# Altium PCB RA64500_jc20_rotary2.PcbDoc
Units mm, origin at the board's own origin, x right, y up, seen from the top; angles counter-clockwise.
Board outline 45.5 x 78 mm, 2 copper layers (Top Layer, Bottom Layer), stack 0.58 mm thick; 53 components, 74 nets, 212 pads, 162 vias.
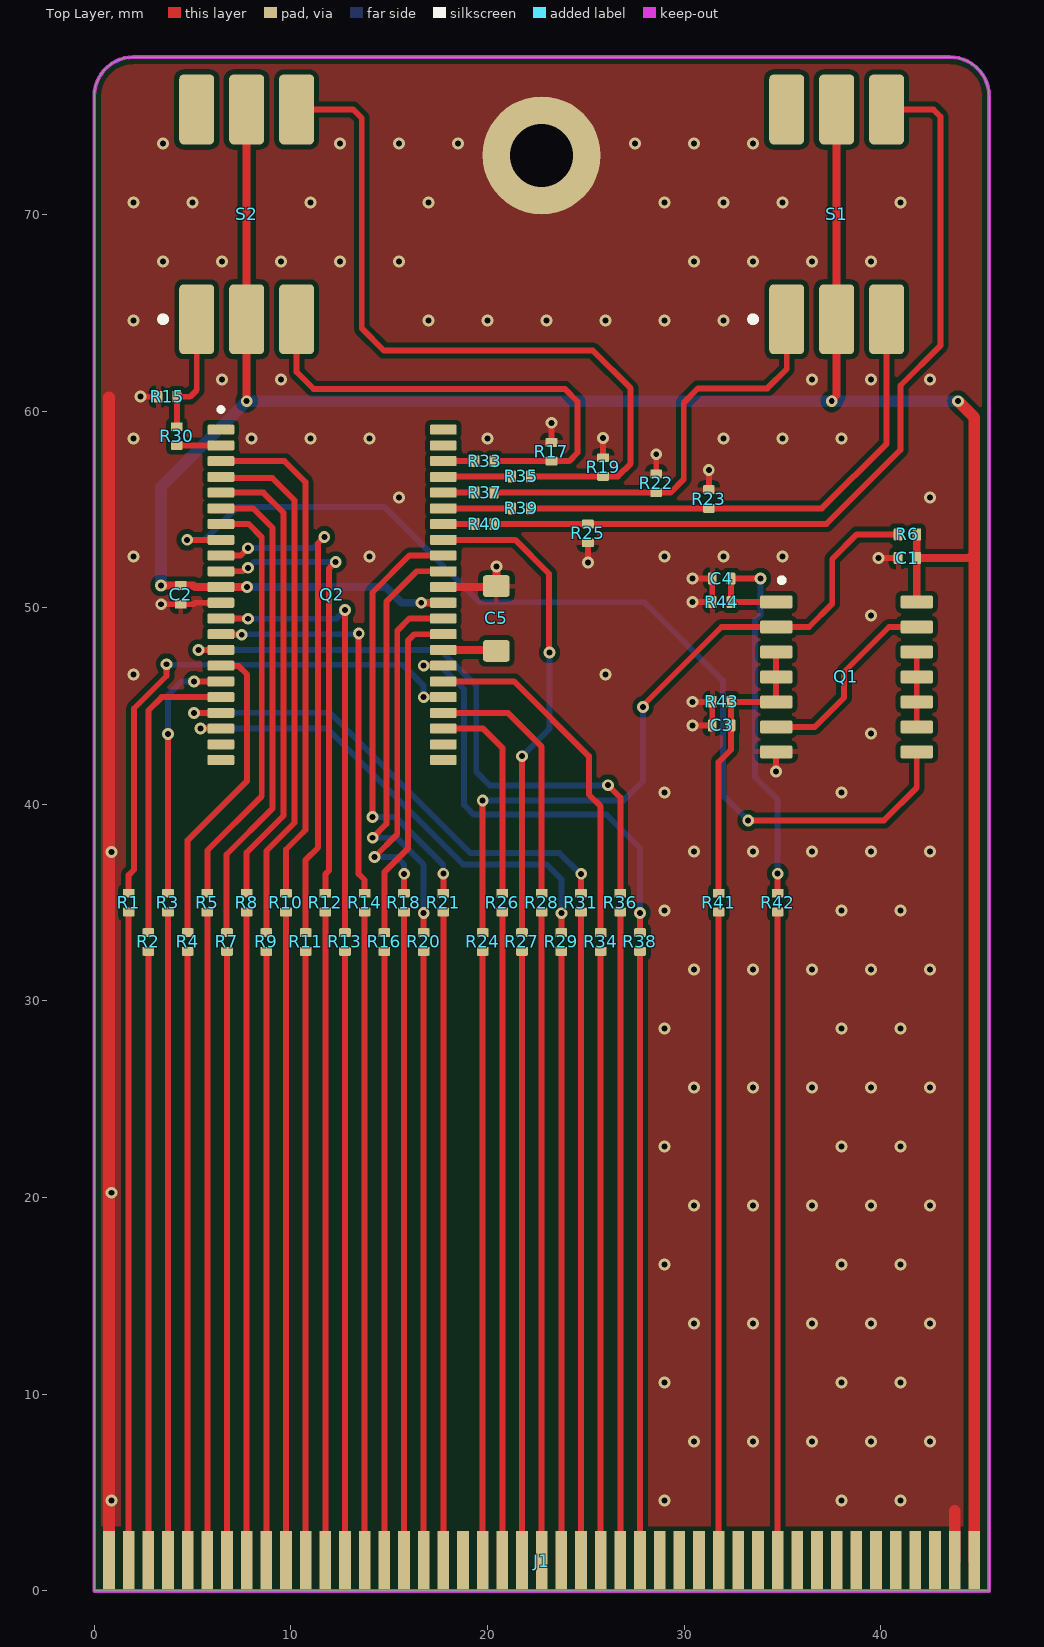
[diagram p0: Top Layer view]
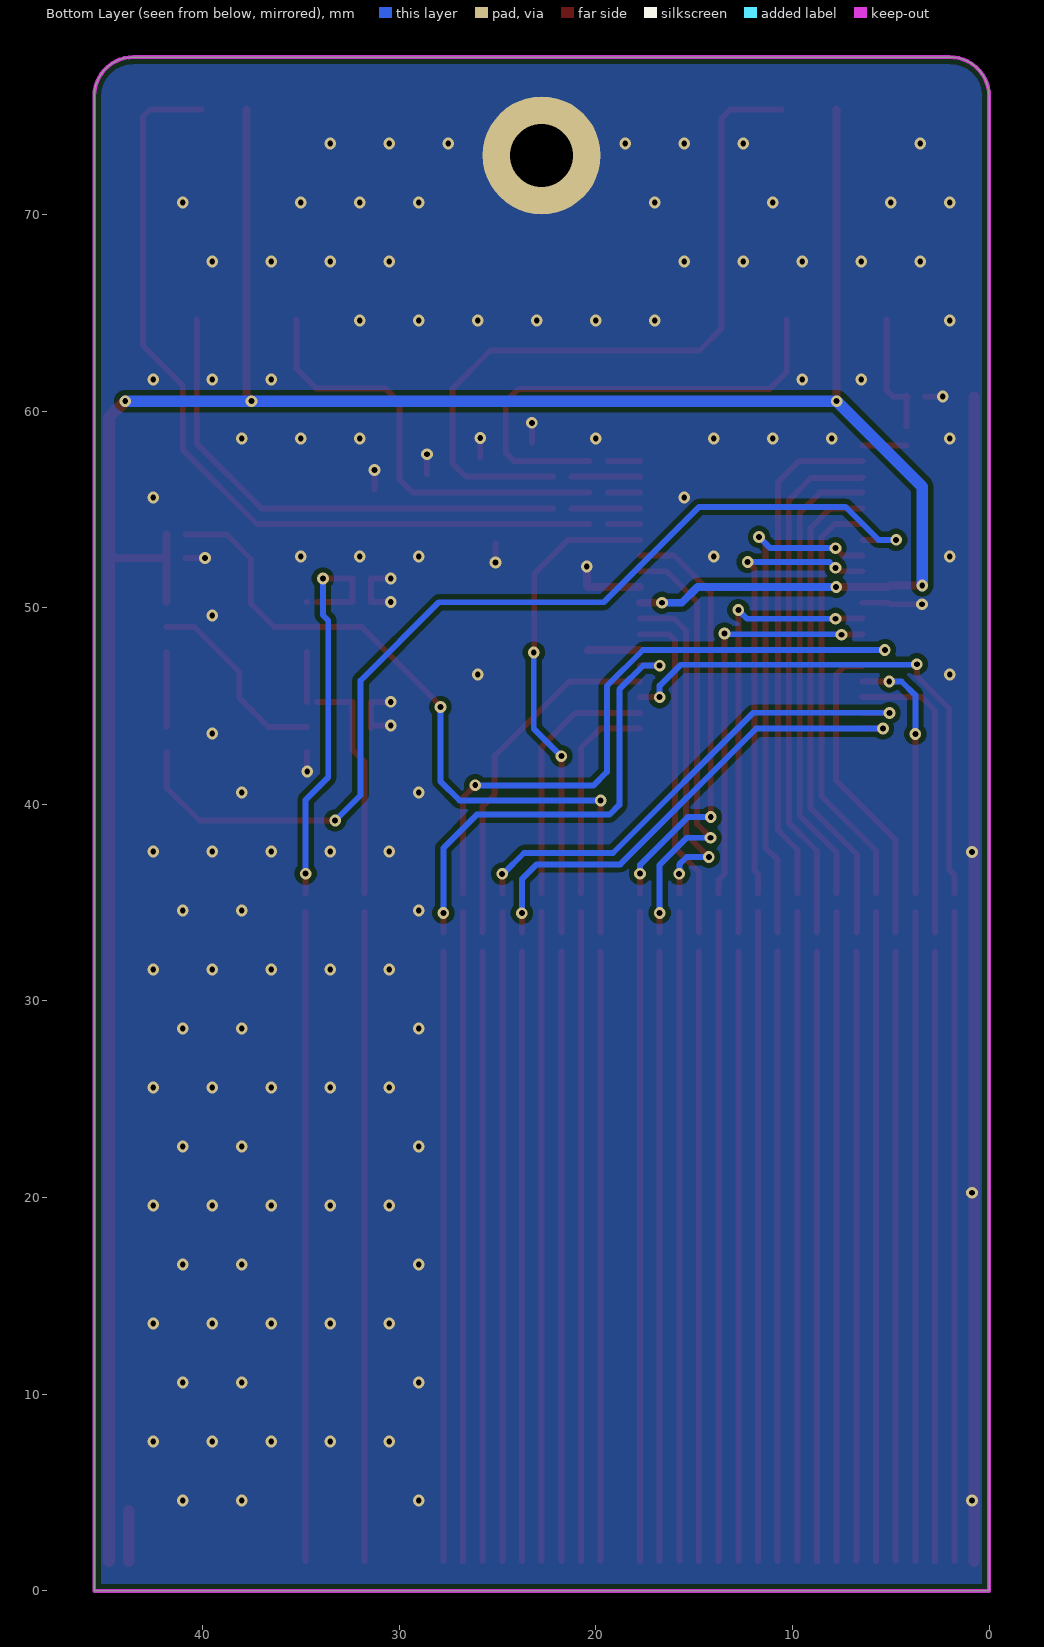
[diagram p1: Bottom Layer view, seen from below]
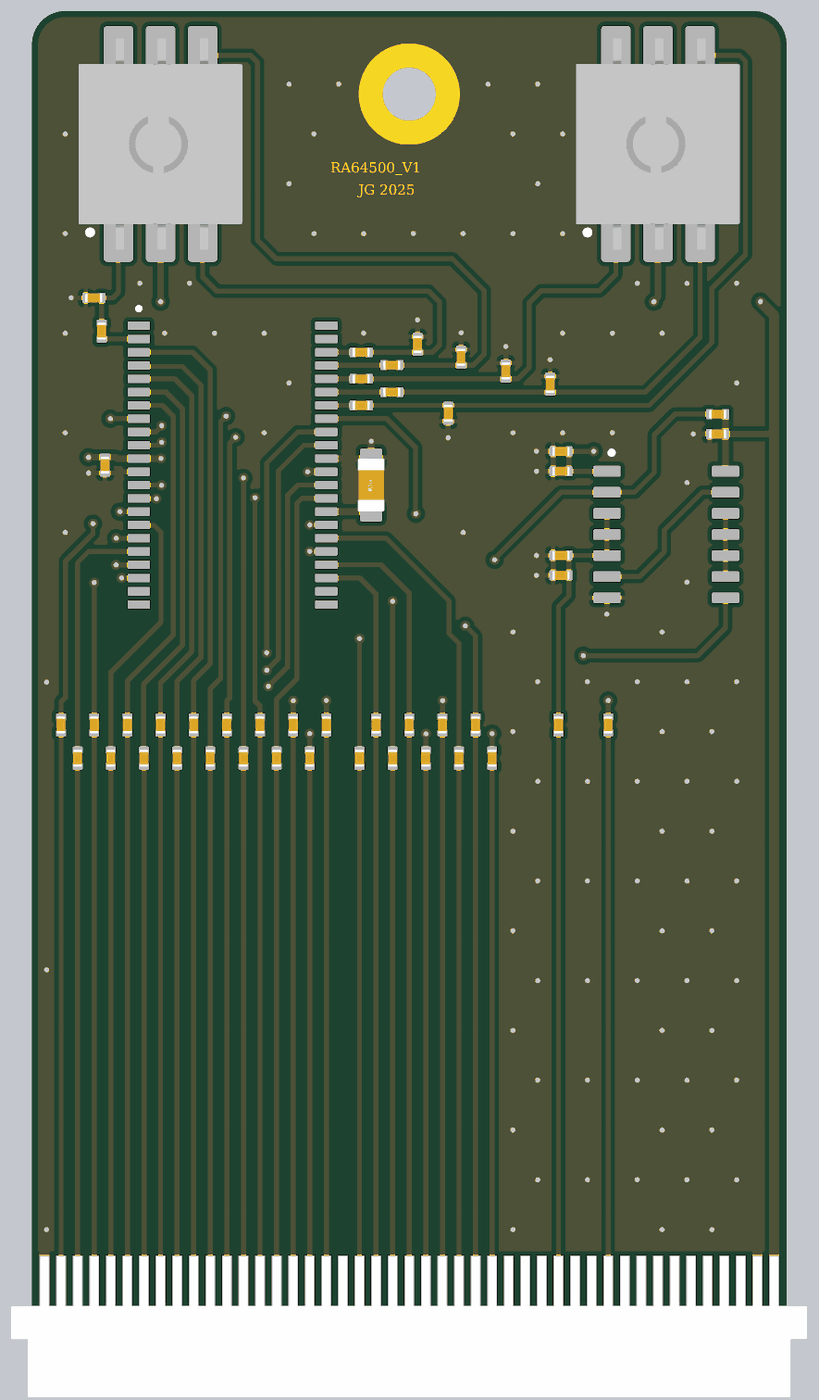
[diagram p2: 3D render of the assembled board from above, using the file's embedded part models]

## Layer stack, top to bottom
Top Solder: solder mask 0.0102, Solder Resist, Dk 3.5
Top Layer: signal copper 0.0356
Dielectric 1: dielectric 0.5086, FR-4, Dk 4.8
Bottom Layer: signal copper 0.0356
Bottom Solder: solder mask 0.0102, Solder Resist, Dk 3.5

## Board outline
0,0 0,76 cw(c2,76) 2,78 43.5,78 cw(c43.5,76) 45.5,76 45.5,0

## Design rules (kind name [scope] priority, off if disabled: settings)
Clearance [All] p1: gap=0.254 ignorepadtopadclearanceinfootprint=FALSE
PolygonConnect [All] p1: thpad.connectstyle=Direct thpad.reliefconductorwidth=0.254 thpad.reliefentries=4 thpad.polygonreliefangle="90 Angle" thpad.airgapwidth=0.254 smdpad.connectstyle=Relief smdpad.reliefconductorwidth=0.254 smdpad.reliefentries=4 smdpad.polygonreliefangle="90 Angle" smdpad.airgapwidth=0.254 via.connectstyle=Direct via.reliefconductorwidth=0.254 via.reliefentries=4 via.polygonreliefangle="90 Angle" via.airgapwidth=0.254
RoutingVias [All] p1: holewidth=0.711 width=1.27 viastyle="Through Hole" minholewidth=0.711 minwidth=1.27 maxholewidth=0.711 maxwidth=1.27
SolderMaskExpansion [All] p1: expansion=0.102 istentingtop=FALSE
Width [All] p1: maxlimit=0.6 minlimit=0.254 preferedwidth=0.3
30 further rules are at their usual default settings.

## Components (designator, comment, footprint, x,y, rotation, side; value= is the part's Value field where it differs from the comment)
C1 "220pF" 0402 41.35,52.525 r0 top
C2 "100nF" 0402 4.4,50.65 r90 top
C3 "220pF" 0402 31.9,44.012 r0 top
C4 "220pF" 0402 31.9,51.482 r0 top
C5 "C3216X5R1E476M160AC" FP-C3216-160-0_2-MFG 20.45,49.45 r90 top locked
J1 "JC20-C45S-F1-A1" JC20-C45S-F1-A1 0.75,1.525 r0 top locked
Q1 "TC74HC27F" SOP127P780X190-14N 38.25,46.475 r0 top locked
Q2 "CY14E116L-ZS25XI" SOP80P1183X119-44N 12.095,50.65 r0 top locked
R1 "1K" 0402 1.75,35 r270 top locked
R2 "1K" 0402 2.75,33 r270 top locked
R3 "1K" 0402 3.75,35 r270 top locked
R4 "1K" 0402 4.75,33 r270 top locked
R5 "1K" 0402 5.75,35 r270 top locked
R6 "100K" 0402 41.35,53.725 r180 top
R7 "1K" 0402 6.75,33 r270 top locked
R8 "1K" 0402 7.75,35 r270 top locked
R9 "1K" 0402 8.75,33 r270 top locked
R10 "1K" 0402 9.75,35 r270 top locked
R11 "1K" 0402 10.75,33 r270 top locked
R12 "1K" 0402 11.75,35 r270 top locked
R13 "1K" 0402 12.75,33 r270 top locked
R14 "1K" 0402 13.75,35 r270 top locked
R15 "100K" 0402 3.725,60.725 r180 top
R16 "1K" 0402 14.75,33 r270 top locked
R17 "100K" 0402 23.25,57.925 r90 top
R18 "1K" 0402 15.75,35 r270 top locked
R19 "100K" 0402 25.875,57.15 r90 top
R20 "1K" 0402 16.75,33 r270 top locked
R21 "1K" 0402 17.75,35 r270 top locked
R22 "100K" 0402 28.575,56.325 r90 top
R23 "100K" 0402 31.25,55.525 r90 top
R24 "1K" 0402 19.75,33 r270 top locked
R25 "100K" 0402 25.1,53.775 r270 top
R26 "1K" 0402 20.75,35 r270 top locked
R27 "1K" 0402 21.75,33 r270 top locked
R28 "1K" 0402 22.75,35 r270 top locked
R29 "1K" 0402 23.75,33 r270 top locked
R30 "1K" 0402 4.2,58.725 r90 top
R31 "1K" 0402 24.75,35 r270 top locked
R33 "1K" 0402 19.85,57.45 r180 top
R34 "1K" 0402 25.75,33 r270 top locked
R35 "1K" 0402 21.7,56.675 r180 top
R36 "1K" 0402 26.75,35 r270 top locked
R37 "1K" 0402 19.85,55.85 r180 top
R38 "1K" 0402 27.75,33 r270 top locked
R39 "1K" 0402 21.7,55.05 r180 top
R40 "1K" 0402 19.85,54.25 r180 top
R41 "1K" 0402 31.75,35 r270 top locked
R42 "1K" 0402 34.75,35 r270 top locked
R43 "100K" 0402 31.9,45.212 r180 top
R44 "100K" 0402 31.9,50.282 r180 top
S1 "94HBB08WT" 94HBB08WT 37.75,70 r270 top locked
S2 "94HBB08WT" 94HBB08WT 7.75,70 r270 top locked

## Footprints (in the part's own frame and the unit in brackets; to place one, negate y for a bottom-side part, rotate by r counter-clockwise, add the part's x,y. Pads: shape width x height; smd on the part's side, far side on the other; paste and mask are expansions set on the pad)
94HBB08WT [mil] "8 pos rotary coded switch"
  rrect25% 140x70 smd mask+1.97: 1(210,-100) 2(210,0) 3(210,100) 4(-210,100) 5(-210,0) 6(-210,-100)
  silkscreen extent 204,-173 216,-161, body extent -250,-194 250,194, height 488
0402 [mm]
  rrect25% 0.45x0.6 smd paste+0 mask+0.05: 1(-0.475,0) 2(0.475,0)
  body extent -0.53,-0.28 0.53,0.28, height 0.55
FP-C3216-160-0_2-MFG [mm]
  rrect25% 1.1x1.35 smd paste+0 mask+0.05: 1(-1.65,0) 2(1.65,0)
  body extent -2.3,-1 2.3,1, height 0.25
JC20-C45S-F1-A1 [mm] "45 pin 1mm pitch connector"
  rect 0.6x3.05 smd mask+0.05: 1(0,0) 2(1,0) 3(2,0) 4(3,0) 5(4,0) 6(5,0) 7(6,0) 8(7,0) 9(8,0) 10(9,0) 11(10,0) 12(11,0) 13(12,0) 14(13,0) 15(14,0) 16(15,0) 17(16,0) 18(17,0) 19(18,0) 20(19,0) 21(20,0) 22(21,0) 23(22,0) 24(23,0) 25(24,0) 26(25,0) 27(26,0) 28(27,0) 29(28,0) 30(29,0) 31(30,0) 32(31,0) 33(32,0) 34(33,0) 35(34,0) 36(35,0) 37(36,0) 38(37,0) 39(38,0) 40(39,0) 41(40,0) 42(41,0) 43(42,0) 44(43,0) 45(44,0)
  body extent -2,-7.03 46,1.47, height 1.3
SOP80P1183X119-44N [mm] "TSSOP II, 44-Leads, Body 18.5x11.9mm, Pitch 0.8mm, IPC Medium Density"
  rrect25% 1.36x0.51 smd mask+0.05: 1(-5.655,8.4) 2(-5.655,7.6) 3(-5.655,6.8) 4(-5.655,6) 5(-5.655,5.2) 6(-5.655,4.4) 7(-5.655,3.6) 8(-5.655,2.8) 9(-5.655,2) 10(-5.655,1.2) 11(-5.655,0.4) 12(-5.655,-0.4) 13(-5.655,-1.2) 14(-5.655,-2) 15(-5.655,-2.8) 16(-5.655,-3.6) 17(-5.655,-4.4) 18(-5.655,-5.2) 19(-5.655,-6) 20(-5.655,-6.8) 21(-5.655,-7.6) 22(-5.655,-8.4) 23(5.655,-8.4) 24(5.655,-7.6) 25(5.655,-6.8) 26(5.655,-6) 27(5.655,-5.2) 28(5.655,-4.4) 29(5.655,-3.6) 30(5.655,-2.8) 31(5.655,-2) 32(5.655,-1.2) 33(5.655,-0.4) 34(5.655,0.4) 35(5.655,1.2) 36(5.655,2) 37(5.655,2.8) 38(5.655,3.6) 39(5.655,4.4) 40(5.655,5.2) 41(5.655,6) 42(5.655,6.8) 43(5.655,7.6) 44(5.655,8.4)
  silkscreen extent -5.75,9.33 -5.55,9.52, body extent -5.13,-9.26 5.13,9.26, height 1.2
SOP127P780X190-14N [mm] "SOP, 14-Leads, Body 10.30x5.30mm, Pitch 1.27mm, IPC Medium Density"
  rrect25% 1.65x0.65 smd mask+0.05: 1(-3.575,3.81) 2(-3.575,2.54) 3(-3.575,1.27) 4(-3.575,0) 5(-3.575,-1.27) 6(-3.575,-2.54) 7(-3.575,-3.81) 8(3.575,-3.81) 9(3.575,-2.54) 10(3.575,-1.27) 11(3.575,0) 12(3.575,1.27) 13(3.575,2.54) 14(3.575,3.81)
  silkscreen extent -3.42,4.8 -3.17,5.05, body extent -2.65,-5.15 2.65,5.15, height 1.9

## Part data
C1 C3 C4: library part "0402 Cap", "0402 220pF"
C2: library part "0402 Cap", "0402 100nF"
C5: library part CMP-2000-05397-3, "Multilayer Ceramic Capacitors 47uF ±20% 25V X5R SMD 1206", Capacitance=47uF, Case Code (Imperial)=1206, Case Code (Metric)=3216, Dielectric=X5R, Dielectric Material=Ceramic, Max Operating Temperature=85°C, Min Operating Temperature=-55°C, Package Quantity=1, Tolerance=20%, Voltage=25V, Case/Package=1206, Depth=1.6mm, Height=1.6mm, Lead Free="Lead Free", Length=0.126inch, Mount="Surface Mount", Packaging="Tape and Reel", REACH SVHC="No SVHC", Resistor Type=Ceramic, RoHS Compliant=Yes, Series=C, Termination=SMD/SMT, Thickness=0.071inch, Voltage Rating=25V, Voltage Rating (DC)=25V, Weight=0.000571oz, Width=0.063inch
J1: "45 Pin 1mm pitch connector"
Q1: "Triple 3-input NOR Gate"
Q2: "2Mx8 Bit nvSRAM"
R1 R2 R3 R4 R5 R7 R8 R9 R10 R11 R12 R13 R14 R16 R18 R20 R21 R24 R26 R27 R28 R29 R30 R31 R33 R34 R35 R36 R37 R38 R39 R40 R41 R42: library part "0402 Res", "0402 1K"
R6 R15 R17 R19 R22 R23 R25 R43 R44: library part "0402 Res", "0402 100K"
S1 S2: "8 pos rotary coded switch"

## Free pads (board coordinates)
  round 6 hole 3.2 mask+0.05: MNT(22.75,73)

## Via types
v1: diameter 0.6, hole 0.3, Top Layer to Bottom Layer, tented both sides, 162 vias

## Nets (pads, with @x,y where several pads share a name; then routed paths per layer and width w, separated by ;. In a path a pad name is that pad's centre, name@x,y a point inside that pad or via, vN(x,y) a via of type N, cw(c..) or ccw(c..) an arc to the next point about the centre after c; other vN are vias at no path point)
A15: R25.1 R40.1 S1.4 | length 43.2
  Top Layer w0.3: R40.1 24.1,54.25 R25.1 37.225,54.25 41,58.025 41,61.3 43.025,63.325 43.025,74.975 42.666,75.334 S1.4@40.04,75.334
A16: R23.1 R39.1 S1.3 | length 25.8
  Top Layer w0.3: R39.1 31.025,55.05 R23.1 37,55.05 40.29,58.34 S1.3
A17: R22.1 R37.1 S1.1 | length 22.3
  Top Layer w0.3: R37.1 R22.1 ; R22.1@28.6,55.85 29.3,55.85 29.975,56.525 29.975,60.425 30.7,61.15 34.225,61.15 35.21,62.135 S1.1
A18: R19.1 R35.1 S2.4 | length 38.1
  Top Layer w0.3: S2.4@10.54,75.334 13.166,75.334 13.6,74.9 13.6,64.2 14.725,63.075 25.35,63.075 27.275,61.15 27.275,57.325 26.625,56.675 R19.1 R35.1
A19: R17.1 R33.1 S2.3 | length 24.6
  Top Layer w0.3: S2.3 10.29,61.985 11.15,61.125 23.925,61.125 24.575,60.475 24.575,57.875 24.15,57.45 R33.1
A20: R15.1 R30.2 S2.1 | length 6.4
  Top Layer w0.3: R15.1@4.125,60.725 4.875,60.725 5.21,61.06 S2.1 ; R30.2 R15.1@4.2,60.8
C\E\1: Q1.2 R6.2 R24.1 | length 37
  Top Layer w0.3: R24.1 v1(19.75,40.2) ; v1(27.9,44.95) 27.9,45.025 31.89,49.015 Q1.2 36.34,49.015 37.525,50.2 37.525,52.475 38.775,53.725 R6.2
  Bottom Layer w0.3: v1(19.75,40.2) 26.925,40.2 27.9,41.175 v1(27.9,44.95)
C\S\: Q1.8 Q2.8 | length 52
  Top Layer w0.3: v1(4.725,53.45) Q2.8 ; v1(33.25,39.175) 40.15,39.175 41.825,40.85 Q1.8
  Bottom Layer w0.3: v1(4.725,53.45) 5.625,53.45 7.3,55.125 14.742,55.125 19.592,50.275 27.975,50.275 31.963,46.287 31.963,40.462 v1(33.25,39.175)
CE: C3.2 Q1.3 Q1.4 Q1.5 R41.1 R43.1 | length 14.3
  Top Layer w0.3: R41.1 31.75,42.15 32.375,42.775 C3.2 R43.1 Q1.5@34.168,45.212 ; Q1.5@34.668,45.212 Q1.5 Q1.4 Q1.3
GND: C1.1 C2.1 C3.1 C4.1 C5.2 J1.1 J1.44 pad.MNT Q1.7 Q2.12 Q2.34 R15.2 R17.2 R19.2 R22.2 R23.2 R25.2 R43.2 R44.2 | length 80.8
  Top Layer w0.3: 0.75,3.769 0.843,3.861 ; v1@2.354,60.725 R15.2 ; v1(3.404,50.175) C2.1 5.05,50.175 5.125,50.25 Q2.12 ; R17.2 v1(23.25,59.4) ; v1(25.1,52.3) R25.2 ; R19.2 v1(25.875,58.625) ; R22.2 v1(28.575,57.8) ; v1(30.425,44.012) C3.1 ; v1(30.425,45.212) R43.2 C3.1 ; v1(30.425,50.282) R44.2 C4.1 v1(30.425,51.482) ; R23.2 v1(31.25,57) ; C3.1@31.425,43.887 C3.1 ; v1@34.675,41.681 Q1.7 ; v1(39.875,52.525) C1.1
  Top Layer w0.4: Q2.34 20.4,51.05 C5.2 v1@20.45,52.084
  Top Layer w0.6: 0.75,3.769 0.75,37.575 0.75,60.7 ; J1.44 43.75,4.075
  other v1: 0.875,4.6 29,4.6 38,4.6 41,4.6 30.5,7.6 33.5,7.6 36.5,7.6 39.5,7.6 42.5,7.6 29,10.6 38,10.6 41,10.6 30.5,13.6 33.5,13.6 36.5,13.6 39.5,13.6 42.5,13.6 29,16.6 38,16.6 41,16.6 30.5,19.6 33.5,19.6 36.5,19.6 39.5,19.6 42.5,19.6 0.875,20.25 29,22.6 38,22.6 41,22.6 30.5,25.6 33.5,25.6 36.5,25.6 39.5,25.6 42.5,25.6 29,28.6 38,28.6 41,28.6 30.5,31.6 33.5,31.6 36.5,31.6 39.5,31.6 42.5,31.6 29,34.6 38,34.6 41,34.6 0.875,37.575 30.5,37.6 33.5,37.6 36.5,37.6 39.5,37.6 42.5,37.6 29,40.6 38,40.6 34.667,41.673 39.5,43.6 2,46.6 26,46.6 39.5,49.6 20.458,52.092 2,52.6 14,52.6 29,52.6 32,52.6 35,52.6 15.5,55.6 42.5,55.6 2,58.6 8,58.6 11,58.6 14,58.6 20,58.6 32,58.6 35,58.6 38,58.6 2.354,60.733 6.5,61.6 9.5,61.6 36.5,61.6 39.5,61.6 42.5,61.6 2,64.6 17,64.6 20,64.6 23,64.6 26,64.6 29,64.6 32,64.6 3.5,67.6 6.5,67.6 9.5,67.6 12.5,67.6 15.5,67.6 30.5,67.6 33.5,67.6 36.5,67.6 39.5,67.6 2,70.6 5,70.6 11,70.6 17,70.6 29,70.6 32,70.6 35,70.6 41,70.6 3.5,73.6 12.5,73.6 15.5,73.6 18.5,73.6 27.5,73.6 30.5,73.6 33.5,73.6
I/O1: Q2.9 R11.1 | length 26.2
  Top Layer w0.3: Q2.9 7.446,52.65 7.813,53.017 v1(7.813,53.025) ; R11.1 10.75,37.175 11.375,37.8 11.375,53.274 v1(11.7,53.6)
  Bottom Layer w0.3: v1(7.813,53.025) 11.125,53.025 v1(11.7,53.6)
I/O2: Q2.10 R12.1 | length 23.1
  Top Layer w0.3: Q2.10 7.556,51.849 7.732,52.025 v1(7.813,52.025) ; R12.1 11.75,36.45 11.929,36.629 11.929,51.979 v1(12.275,52.325)
  Bottom Layer w0.3: v1(7.813,52.025) 7.821,52.025 8.121,52.325 v1(12.275,52.325)
I/O3: Q2.13 R13.1 | length 22.9
  Top Layer w0.3: Q2.13 7.8,49.45 v1(7.813,49.437) ; R13.1 v1(12.75,49.875)
  Bottom Layer w0.3: v1(7.813,49.437) 12.312,49.437 v1(12.75,49.875)
I/O4: Q2.14 R14.1 | length 20.4
  Top Layer w0.3: Q2.14 6.453,48.637 7.488,48.637 v1(7.5,48.625) ; v1(13.454,48.687) 13.446,48.679 13.446,36.454 13.75,36.15 R14.1
  Bottom Layer w0.3: v1(7.5,48.625) 7.525,48.65 13.417,48.65 v1(13.454,48.687)
I/O5: Q2.31 R16.1 | length 17.3
  Top Layer w0.3: R16.1 14.75,36.55 15.962,37.762 15.962,48.337 16.275,48.65 Q2.31
I/O6: Q2.32 R18.1 | length 17.7
  Top Layer w0.3: v1(14.25,37.325) 15.408,38.483 15.408,48.833 16.025,49.45 Q2.32 ; R18.1 15.75,36.459 v1(15.758,36.467)
  Bottom Layer w0.3: v1(14.25,37.325) 15.375,37.325 15.75,36.95 15.75,36.475 v1(15.758,36.467)
I/O7: Q2.35 R20.1 | length 22.4
  Top Layer w0.3: v1(14.158,38.3) 14.854,38.996 14.854,49.062 14.854,50.304 16.4,51.85 Q2.35 ; R20.1 v1(16.75,34.475)
  Bottom Layer w0.3: v1(14.158,38.3) 15.375,38.3 16.75,36.925 v1(16.75,34.475)
I/O8: Q2.36 R21.1 | length 21.9
  Top Layer w0.3: v1(14.15,39.35) 14.15,48.388 14.158,48.396 14.158,48.979 14.15,48.987 14.15,50.775 16.025,52.65 Q2.36 ; R21.1 v1(17.75,36.475)
  Bottom Layer w0.3: v1(14.15,39.35) 15.325,39.35 17.745,36.93 17.745,36.48 v1(17.75,36.475)
NetC5_1: C5.1 Q2.30 | length 2.7
  Top Layer w0.3: C5.1@20.4,47.85 C5.1
  Top Layer w0.4: Q2.30 C5.1@20.4,47.85
NetJ1_2: J1.2 R1.2 | length 33
  Top Layer w0.3: J1.2 R1.2
NetJ1_3: J1.3 R2.2 | length 31
  Top Layer w0.3: J1.3 R2.2
NetJ1_4: J1.4 R3.2 | length 33
  Top Layer w0.3: J1.4 R3.2
NetJ1_5: J1.5 R4.2 | length 31
  Top Layer w0.3: J1.5 R4.2
NetJ1_6: J1.6 R5.2 | length 33
  Top Layer w0.3: J1.6 R5.2
NetJ1_7: J1.7 R7.2 | length 31
  Top Layer w0.3: J1.7 R7.2
NetJ1_8: J1.8 R8.2 | length 33
  Top Layer w0.3: J1.8 R8.2
NetJ1_9: J1.9 R9.2 | length 31
  Top Layer w0.3: J1.9 R9.2
NetJ1_10: J1.10 R10.2 | length 33
  Top Layer w0.3: J1.10 R10.2
NetJ1_11: J1.11 R11.2 | length 31
  Top Layer w0.3: J1.11 R11.2
NetJ1_12: J1.12 R12.2 | length 33
  Top Layer w0.3: J1.12 R12.2
NetJ1_13: J1.13 R13.2 | length 31
  Top Layer w0.3: J1.13 R13.2
NetJ1_14: J1.14 R14.2 | length 33
  Top Layer w0.3: J1.14 R14.2
NetJ1_15: J1.15 R16.2 | length 31
  Top Layer w0.3: J1.15 R16.2
NetJ1_16: J1.16 R18.2 | length 33
  Top Layer w0.3: J1.16 R18.2
NetJ1_17: J1.17 R20.2 | length 31
  Top Layer w0.3: J1.17 R20.2
NetJ1_18: J1.18 R21.2 | length 33
  Top Layer w0.3: J1.18 R21.2
NetJ1_20: J1.20 R24.2 | length 31
  Top Layer w0.3: J1.20 R24.2
NetJ1_21: J1.21 R26.2 | length 33
  Top Layer w0.3: J1.21 R26.2
NetJ1_22: J1.22 R27.2 | length 31
  Top Layer w0.3: J1.22 R27.2
NetJ1_23: J1.23 R28.2 | length 33
  Top Layer w0.3: J1.23 R28.2
NetJ1_24: J1.24 R29.2 | length 31
  Top Layer w0.3: J1.24 R29.2
NetJ1_25: J1.25 R31.2 | length 33
  Top Layer w0.3: J1.25 R31.2
NetJ1_26: J1.26 R34.2 | length 31
  Top Layer w0.3: J1.26 R34.2
NetJ1_27: J1.27 R36.2 | length 33
  Top Layer w0.3: J1.27 R36.2
NetJ1_28: J1.28 R38.2 | length 31
  Top Layer w0.3: J1.28 R38.2
NetJ1_32: J1.32 R41.2 | length 33
  Top Layer w0.3: J1.32 R41.2
NetJ1_35: J1.35 R42.2 | length 33
  Top Layer w0.3: J1.35 R42.2
NetQ1_6: Q1.6 Q1.13 | length 10
  Top Layer w0.3: Q1.6 36.635,43.935 38.125,45.425 38.125,46.725 40.415,49.015 Q1.13
NetQ1_9: Q1.9 Q1.10 Q1.11 Q1.12 | length 3.8
  Top Layer w0.3: Q1.9 Q1.10 Q1.11 Q1.12
NetQ2_2: Q2.2 R30.1 | length 2.2
  Top Layer w0.3: R30.1 Q2.2
NetQ2_38: Q2.38 R40.2 | length 1.6
  Top Layer w0.3: Q2.38 R40.2
NetQ2_39: Q2.39 R39.2 | length 3.5
  Top Layer w0.3: Q2.39 R39.2
NetQ2_40: Q2.40 R37.2 | length 1.6
  Top Layer w0.3: Q2.40 R37.2
NetQ2_41: Q2.41 R35.2 | length 3.5
  Top Layer w0.3: Q2.41 17.775,56.675 R35.2
NetQ2_42: Q2.42 R33.2 | length 1.6
  Top Layer w0.3: Q2.42 R33.2
O\E\: Q2.37 R27.1 | length 24.9
  Top Layer w0.3: Q2.37 21.4,53.45 23.125,51.725 23.125,47.75 v1(23.15,47.725) ; R27.1 v1(21.75,42.45)
  Bottom Layer w0.3: v1(21.75,42.45) 23.15,43.85 v1(23.15,47.725)
RA0: Q2.3 R10.1 | length 26.1
  Top Layer w0.3: Q2.3 9.675,57.45 10.741,56.384 10.741,38.692 10.641,38.592 10.641,38.591 9.75,37.7 R10.1
RA1: Q2.4 R9.1 | length 26.8
  Top Layer w0.3: Q2.4 6.495,56.595 9.055,56.595 10.187,55.463 10.187,54.263 10.187,39.737 10.187,39.063 8.75,37.626 R9.1
RA2: Q2.5 R8.1 | length 23.7
  Top Layer w0.3: Q2.5 8.6,55.85 9.625,54.825 9.625,39.426 7.75,37.551 R8.1
RA3: Q2.6 R7.1 | length 24.6
  Top Layer w0.3: Q2.6 8.075,55.05 9.071,54.054 9.071,39.797 6.725,37.451 6.725,33.5 R7.1
RA4: Q2.7 R5.1 | length 21.6
  Top Layer w0.3: R5.1 5.75,37.65 8.517,40.417 8.517,53.583 7.85,54.25 Q2.7
RA5: Q2.16 R4.1 | length 15.9
  Top Layer w0.3: R4.1 4.75,38.175 7.775,41.2 7.775,46.599 7.349,47.025 6.465,47.025 Q2.16
RA6: Q2.17 R3.1 | length 13.1
  Top Layer w0.3: R3.1 v1(3.75,43.575) ; v1(5.075,46.25) 5.08,46.245 6.435,46.245 Q2.17
  Bottom Layer w0.3: v1(3.75,43.575) 3.75,45.55 4.45,46.25 v1(5.075,46.25)
RA7: Q2.18 R2.1 | length 15.3
  Top Layer w0.3: R2.1 2.75,44.775 3.425,45.45 Q2.18
RA8: Q2.19 R31.1 | length 25.4
  Top Layer w0.3: v1(5.068,44.646) Q2.19@6.436,44.646 ; R31.1 v1@24.75,36.459
  Bottom Layer w0.3: v1(5.068,44.646) 5.08,44.658 11.992,44.658 19.125,37.525 23.65,37.525 24.708,36.467 v1(24.758,36.467)
RA9: Q2.20 R29.1 | length 25.3
  Top Layer w0.3: v1@5.398,43.85 Q2.20 ; R29.1 v1@23.75,34.459
  Bottom Layer w0.3: v1(5.398,43.858) 11.842,43.858 18.75,36.95 23,36.95 23.758,36.192 v1(23.758,34.467)
RA10: Q2.25 R26.1 | length 10.8
  Top Layer w0.3: Q2.25 19.775,43.85 20.75,42.875 R26.1
RA11: Q2.26 R28.1 | length 13.2
  Top Layer w0.3: Q2.26 21.025,44.65 22.75,42.925 R28.1
RA12: Q2.27 R1.1 | length 27.6
  Top Layer w0.3: R1.1 1.75,36.4 2.025,36.675 2.025,44.875 3.675,46.525 v1(3.675,47.125) ; v1(16.75,45.45) Q2.27
  Bottom Layer w0.3: v1(3.675,47.125) 3.7,47.1 15.683,47.1 16.75,46.033 v1(16.75,45.45)
RA13: Q2.28 R34.1 | length 18.2
  Top Layer w0.3: Q2.28 21.35,46.25 25.15,42.45 25.15,40.5 25.75,39.9 R34.1
RA14: Q2.29 R38.1 | length 23.6
  Top Layer w0.3: v1(16.75,47.05) Q2.29 ; R38.1 v1(27.75,34.475)
  Bottom Layer w0.3: v1(16.75,47.05) 17.595,47.05 18.8,45.845 18.8,39.975 19.3,39.475 26.05,39.475 27.75,37.775 v1(27.75,34.475)
RA19: C4.2 Q1.1 R42.1 R44.1 | length 21.1
  Top Layer w0.3: v1(33.875,51.482) C4.2 R44.1 Q1.1@34.172,50.282 ; Q1.1@34.672,50.282 Q1.1 ; R42.1 v1(34.75,36.475)
  Bottom Layer w0.3: v1(33.875,51.482) 33.875,49.625 33.6,49.35 33.6,41.375 34.75,40.225 v1(34.75,36.475)
VCC: C1.2 C2.2 J1.45 Q1.14 Q2.11 Q2.33 R6.1 S1.2 S1.5 S2.2 S2.5 | length 157.6
  Top Layer w0.4: v1(3.4,51.125) C2.2 5.05,51.125 5.125,51.05 Q2.11 v1(7.775,51.05) ; v1(7.75,60.5) S2.5 ; v1(16.625,50.25) Q2.33 ; v1(37.5,60.5) 37.5,60.554 37.75,60.804 S1.5 ; Q1.14 C1.2 ; R6.1 C1.2 ; 44.75,52.8 44.475,52.525 C1.2
  Top Layer w0.6: v1(43.925,60.5) 44.75,59.675 44.75,52.8 J1.45
  Bottom Layer w0.4: v1(7.775,51.05) 14.825,51.05 15.625,50.25 v1(16.625,50.25)
  Bottom Layer w0.6: v1(3.4,51.125) 3.4,56.15 v1(7.75,60.5) v1(37.5,60.5) v1(43.925,60.5)
W\E\: Q2.15 R36.1 | length 33.2
  Top Layer w0.3: v1(5.3,47.85) Q2.15 ; v1(26.125,40.975) 26.75,40.35 R36.1
  Bottom Layer w0.3: v1(5.3,47.85) 17.6,47.85 19.425,46.025 19.425,41.65 20.125,40.95 26.1,40.95 v1(26.125,40.975)
pads on no net: J1.19 J1.29 J1.30 J1.31 J1.33 J1.34 J1.36 J1.37 J1.38 J1.39 J1.40 J1.41 J1.42 J1.43 Q2.1 Q2.21 Q2.22 Q2.23 Q2.24 Q2.43 Q2.44 S1.6 S2.6
copper on no net: | length 2.2
  Top Layer w0.6: 0.75,1.525 0.75,3.769

## Polygon pours and split planes (outlines as drawn)
GND on Bottom Layer "GND_BOT" (solid, remove dead copper, pour order 0): 0,0 0,76 cw(c2,76) 2,78 43.5,78 cw(c43.5,76) 45.5,76 45.5,0
GND on Top Layer "GND_TOP" (solid, remove dead copper, pour order 1): 0,0 0,76 cw(c2,76) 2,78 43.5,78 cw(c43.5,76) 45.5,76 45.5,0

## Keep-outs
Keep-Out Layer:
  the board outline again, w0.2

## Silkscreen, mask and mechanical layers (free items; w line width, h text height)
Top Solder:
  text "RA64500_V1" at 17.991,67.979 h1.2
  text "JG 2025" at 19.684,66.646 h1.2